# Altium PCB 5811FEM.PcbDoc
Units mil, origin at the board's own origin, x right, y up, seen from the top; angles counter-clockwise.
Board outline 1133.06 x 762 mil, 4 copper layers (Top Layer, Internal Plane 1, Signal Layer 1, Bottom Layer), stack 36.417 mil thick; 97 components, 59 nets, 315 pads, 126 vias.
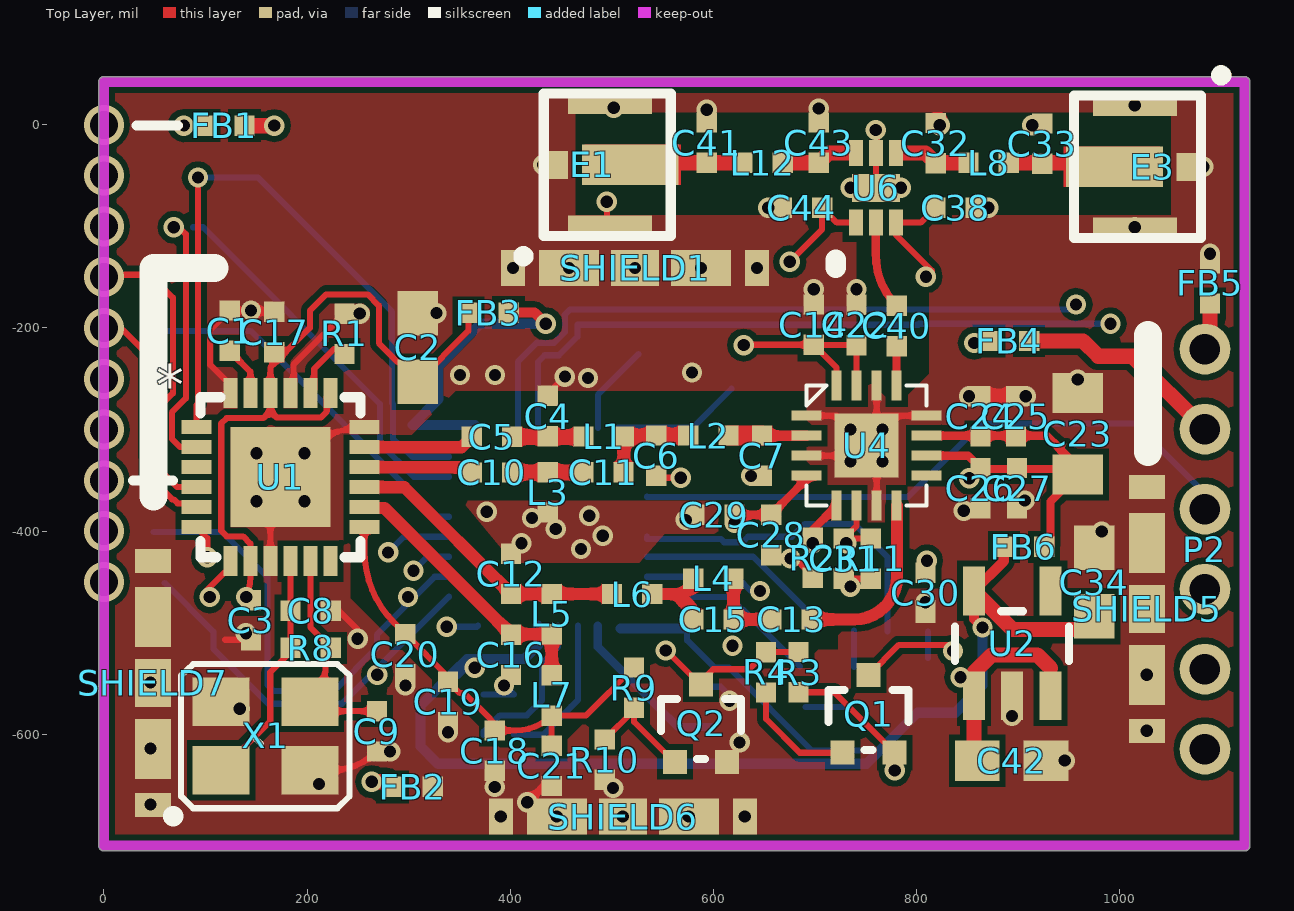
[diagram p0: Top Layer view]
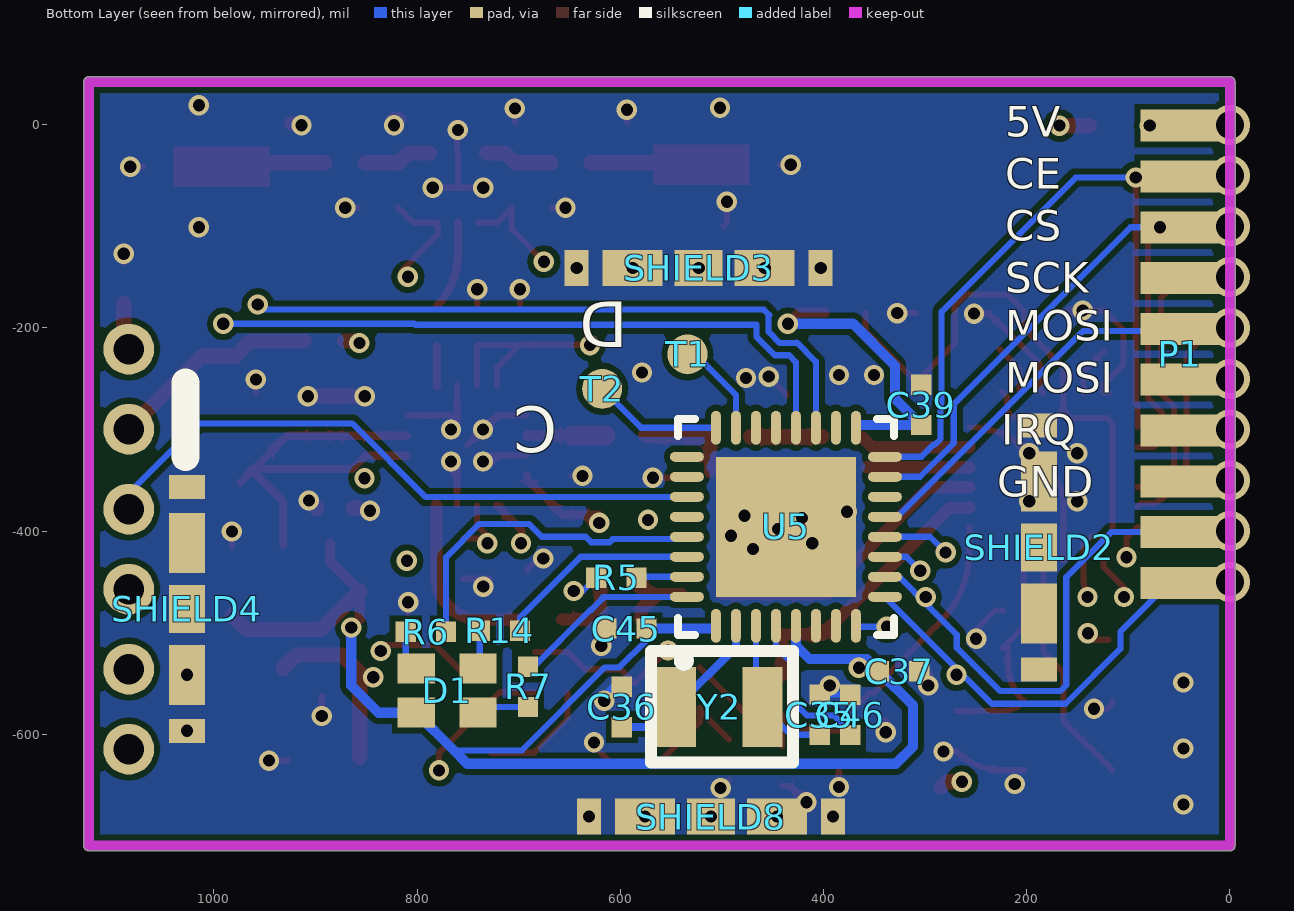
[diagram p1: Bottom Layer view, seen from below]
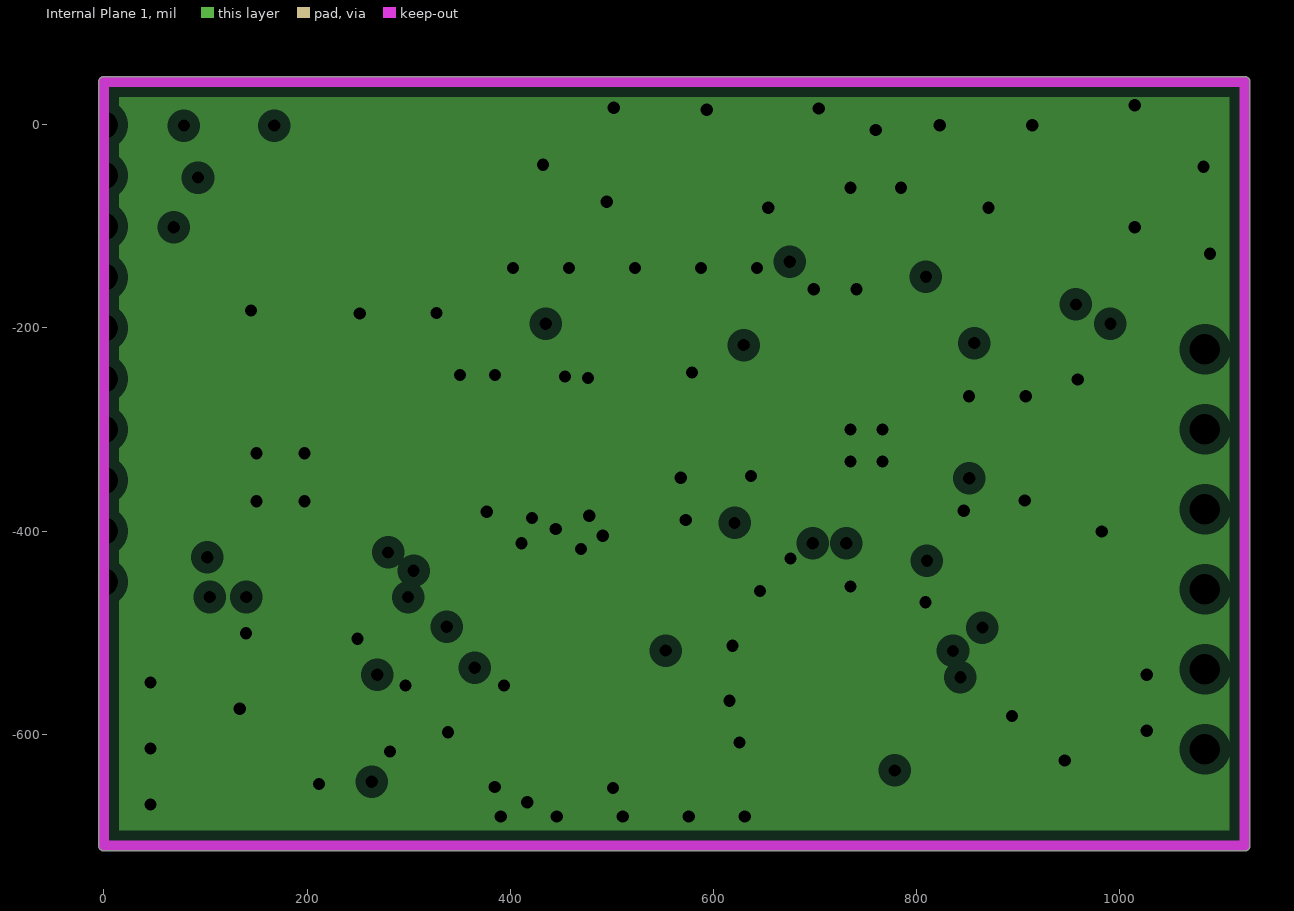
[diagram p2: Internal Plane 1, clearances drawn from the general rule]
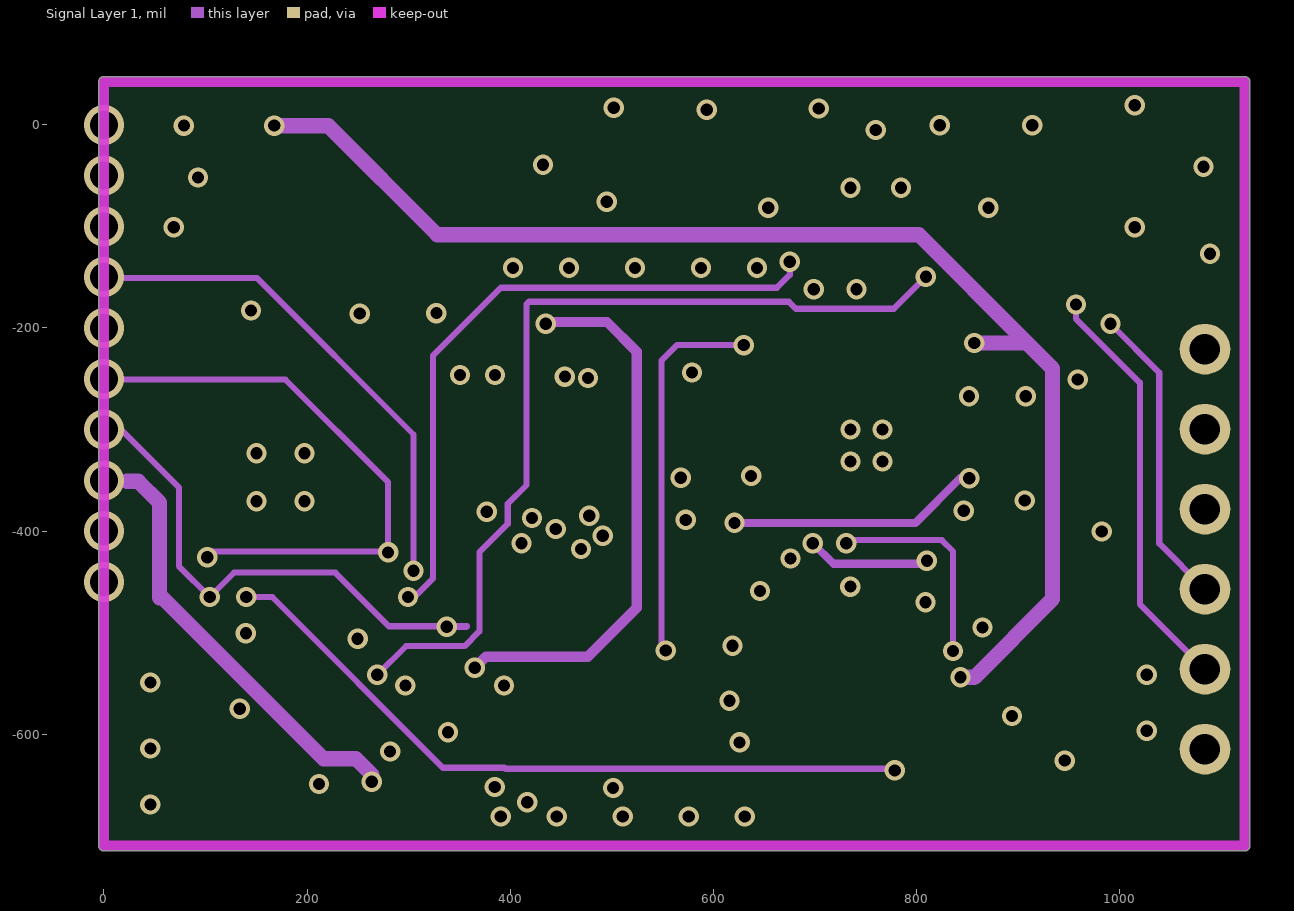
[diagram p3: Signal Layer 1]

## Layer stack, top to bottom
Top Solder: solder mask 0.4, Solder Resist, Dk 3.5
Top Layer: signal copper 0.689
Dielectric 1: prepreg 7.677, FR-4, Dk 4.2
Internal Plane 1: plane copper 0.689, net GND
Dielectric 2: core 18.307, Dk 4.2
Signal Layer 1: signal copper 0.689
Dielectric 3: prepreg 7.677, Dk 4.2
Bottom Layer: signal copper 0.689
Bottom Solder: solder mask 0.4, Solder Resist, Dk 3.5

## Board outline
-5.01,-709.65 ccw(c0,-709.65) 0,-714.66 1123.03,-714.66 ccw(c1123.03,-709.65) 1128.05,-709.65 1128.05,42.32 ccw(c1123.03,42.32) 1123.03,47.34 0,47.34 ccw(c0,42.32) -5.01,42.32

## Design rules (kind name [scope] priority, off if disabled: settings)
Clearance [All] p1: gap=6
MinimumSolderMaskSliver [All] p1 off: minsoldermaskwidth=10
PlaneClearance [All] p1: clearance=10
PlaneConnect [All] p1: planeconnectstyle=Direct reliefexpansion=20 reliefentries=4 reliefconductorwidth=10 reliefairgap=10
PolygonConnect [All] p1: connectstyle=Direct reliefconductorwidth=10 reliefentries=4 polygonreliefangle="90 Angle" airgapwidth=10
RoomDefinition MCU [InComponentClass('MCU')] p1 off: confinementstyle=ConfineIn formatcopy=TRUE lockcomponents=FALSE outline 1142.82,-644.87 3207.82,-644.87 3207.82,-82.87 1142.82,-82.87
RoomDefinition FEM [InComponentClass('FEM')] p2 off: confinementstyle=ConfineIn formatcopy=TRUE lockcomponents=FALSE outline 3398.82,-2606.87 3618.82,-2606.87 3618.82,-2306.87 3398.82,-2306.87
RoomDefinition BK5811 [InComponentClass('BK5811')] p3 off: confinementstyle=ConfineIn formatcopy=TRUE lockcomponents=FALSE outline 3398.82,-2986.87 9698.82,-2986.87 9698.82,-2656.87 3398.82,-2656.87
RoutingVias [All] p1: holewidth=12 width=25 viastyle="Through Hole" minholewidth=12 minwidth=20 maxholewidth=28 maxwidth=50
SilkToBoardRegionClearance [All] p1 off:
SilkToSilkClearance [All] p1 off: silktosilkclearance=10
SilkToSolderMaskClearance [IsPad] p1 off: minsilkscreentomaskgap=10 clearancetoexposedcopper=TRUE
SolderMaskExpansion [All] p1: expansion=4
UnpouredPolygon [All] p1: allowunpoured=FALSE
Width [All] p1: maxlimit=20 minlimit=6 preferedwidth=10
23 further rules are at their usual default settings.

## Classes and differential pairs
component class MCU: C35 C36 C37 C39 C45 C46 D1 FB4 FB5 P2 R5 R6 R7 R14 SHIELD1 SHIELD2 SHIELD3 SHIELD4 SHIELD5 SHIELD6 SHIELD7 SHIELD8 T1 T2 U5 Y2
component class BK5811: C1 C2 C3 C4 C5 C6 C7 C8 C9 C10 C11 C12 C13 C15 C16 C17 C18 C19 C20 C21 FB1 FB2 L1 L2 L3 L4 L5 L6 L7 P1 R1 R8 U1 X1
component class FEM: C14 C22 C23 C24 C25 C26 C27 C28 C29 C30 C31 C32 C33 C34 C38 C40 C41 C42 C43 C44 E1 E3 FB3 FB6 L8 L12 Q1 Q2 R2 R3 R4 R9 R10 R11 U2 U4 U6

## Components (designator, comment, footprint, x,y, rotation, side; value= is the part's Value field where it differs from the comment)
C1 "33nF" 0402 123.82,-202.87 r90 top
C2 "4.7uF" 0603 308.82,-218.87 r270 top
C3 "0.1uF" 0402 144.82,-487.87 r90 top
C4 "0.6pF" 0402 436.82,-286.87 r90 top
C5 "1pF" 0402 381.82,-307.18 r0 top
C6 "NC" 0402 543.82,-325.87 r90 top
C7 "NC" 0402 647.82,-325.87 r90 top
C8 "Cap" 0402 203.35,-478.27 r0 top
C9 "Cap" 0402 268.82,-596.87 r270 top
C10 "1pF" 0402 381.82,-342.18 r0 top
C11 "0.6pF" 0402 491.82,-341.87 r180 top
C12 "0.5pF" 0402 400.82,-441.87 r270 top
C13 "0.5pF" 0402 676.82,-486.87 r0 top
C14 "47pF" 0402 698.82,-196.87 r90 top
C15 "0.5pF" 0402 599.82,-486.87 r0 top
C16 "0.5pF" 0402 400.82,-521.87 r90 top
C17 "0.1uF" 0402 167.82,-203.87 r270 top
C18 "NC" 0402 384.82,-615.87 r270 top
C19 "NC" 0402 338.82,-567.87 r270 top
C20 "NC" 0402 296.82,-520.87 r270 top
C21 "1.2pF" 0402 440.82,-630.87 r270 top
C22 "47pF" 0402 740.82,-196.87 r270 top
C23 "4.7uF" 0805 958.66,-304.13 r270 top
C24 "47pF" 0402 862.82,-286.87 r270 top
C25 "0.1uF" 0402 897.82,-286.87 r270 top
C26 "47pF" 0402 862.82,-357.87 r90 top
C27 "0.1uF" 0402 898.82,-357.87 r90 top
C28 "0.1uF" 0402 656.82,-403.87 r90 top
C29 "47pF" 0402 600.82,-383.87 r0 top
C30 "100pF" 0402 808.82,-460.87 r90 top
C31 "47pF" 0402 728.35,-427.17 r90 top
C32 "NC" 0402 818.82,-17.87 r270 top
C33 "NC" 0402 923.75,-18.4 r270 top
C34 "4.7uF" 0603 974.82,-449.87 r270 top
C35 "22pF" 0402 403.54,-580.71 r90 bottom
C36 "22pF" 0402 598.43,-572.83 r270 bottom
C37 "0.1uF" 0402 325.82,-537.87 r180 bottom
C38 "Cap" 0402 838.58,-81.69 r180 top
C39 "0.1uF" 0402 303.82,-275.87 r90 bottom
C40 "10p" 0402 780.51,-197.83 r270 top
C41 "Cap" 0402 593.5,-17.72 r90 top
C42 "4.7uF" 0603 893.82,-625.87 r180 top
C43 "Cap" 0402 703.74,-17.72 r90 top
C44 "Cap" 0402 687.01,-81.69 r0 top
C45 "0.1uF" 0402 593.82,-495.87 r0 bottom
C46 "0.1uF" 0402 373.82,-580.87 r90 bottom
D1 "LEDx3" LC-0603_Rx2 770.51,-557.01 r270 bottom
E1 "Antenna" IPEX 498.03,-39.37 r90 top
E3 "Antenna" IPEX 1014.76,-41.34 r270 top
FB1 "Res2" 0402 118.82,-0.87 r180 top
FB2 "Res2" 0402 304.13,-651.57 r180 top
FB3 "Res2" 0402 378.82,-184.87 r180 top
FB4 "Res2" 0402 890.82,-212.87 r0 top
FB5 "Res2" 0402 1088.82,-155.87 r270 top
FB6 "Res2" 0402 905.51,-415.35 r0 top
L1 "2nH" 0402 491.82,-306.87 r0 top
L2 "0R/10P" 0402 594.82,-305.87 r0 top
L3 "2nH" 0402 436.82,-361.87 r90 top
L4 "0.5pF" 0402 599.82,-446.87 r0 top
L5 "1nH" 0402 440.82,-481.87 r90 top
L6 "1.5nH" 0402 519.82,-461.87 r0 top
L7 "1nH" 0402 440.82,-561.87 r90 top
L8 "0R/10P" 0402 870.75,-37.4 r0 top
L12 "Inductor" 0402 648.62,-37.4 r180 top
P1 "RFInf" "RFInf - SINGLESIDE" 48.82,-0.87 r180 bottom
P2 "PPMInf" PPMInf 1083.82,-220.87 r180 top
Q1 "PNP" LC-SOT-323(SC-70) 752.82,-579.87 r270 top
Q2 "NPN" LC-SOT-323(SC-70) 587.82,-588.87 r270 top
R1 "62K 1%" 0402 236.82,-205.87 r90 top
R2 "Res2" 0402 697.82,-425.87 r270 top
R3 "Res2" 0402 683.82,-538.87 r90 top
R4 "Res2" 0402 651.82,-538.87 r270 top
R5 "10k" 0402 603.82,-445.87 r0 bottom
R6 "1k" 0402 791.18,-498.94 r0 bottom
R7 "1k" 0402 690.79,-553.07 r270 bottom
R8 "Res2" 0402 203.74,-514.76 r180 top
R9 "10k" 0402 521.82,-553.87 r270 top
R10 "10k" 0402 493.11,-625 r90 top
R11 "Res2" 0402 754.92,-427.17 r90 top
R14 "1k" 0402 718.35,-497.95 r0 bottom
SHIELD1 "D" ShieldHolder_6.5*0.8 522.82,-140.87 r180 top
SHIELD2 "D" ShieldHolder_6.5*0.8 187.82,-415.87 r90 bottom
SHIELD3 "D" ShieldHolder_6.5*0.8 522.82,-140.87 r180 bottom
SHIELD4 "D" ShieldHolder_6.5*0.8 1026.57,-476.38 r90 bottom
SHIELD5 "D" ShieldHolder_6.5*0.8 1026.57,-476.38 r90 top
SHIELD6 "D" ShieldHolder_6.5*0.8 510.82,-680.87 r180 top
SHIELD7 "D" ShieldHolder_6.5*0.8 48.23,-549.21 r90 top
SHIELD8 "D" ShieldHolder_6.5*0.8 510.82,-680.87 r180 bottom
T1 "D" "TestPad - 1mm" 533.82,-225.87 r180 bottom
T2 "TestPad" "TestPad - 1mm" 617.82,-259.87 r180 bottom
U1 "BK5811" BK5811 173.82,-346.87 r0 top
U2 "LP5907" SOT23-5 893.82,-510.87 r0 top
U4 "SKY85703" QFN16-3x3 750.82,-315.87 r0 top
U5 "STM32F051K8U6" STM-UFQFPN32_NX 437.01,-395.67 r90 bottom
U6 "SKY13370-374LF" SKY65404-31 759.84,-62.01 r90 top
X1 "16Mhz" OSCILLATOR-3.2X2.5 158.82,-601.87 r0 top
Y2 "XTAL" "OSCILLATOR-3.2X2.5 - 2P" 500,-572.83 r180 bottom

## Footprints (in the part's own frame and the unit in brackets; to place one, negate y for a bottom-side part, rotate by r counter-clockwise, add the part's x,y. Pads: shape width x height; smd on the part's side, far side on the other; paste and mask are expansions set on the pad)
0402 [mil] "0402-RES"
  rect 20x20 smd: 1(-19.68,0) 2(20,0)
0603 [mil] "0603-RES"
  rect 44x40 smd: 1(-33.46,0) 2(34,0)
0805 [mil]
  rect 39.37x50 smd: 1(-40,0) 2(40,0)
  body extent -50,-30 50,30, height 31
BK5811 [mm]
  rect 2.5x2.5 smd: 0(0,0)
  rect 0.75x0.35 smd: 1(-2.1,1.25) 2(-2.1,0.75) 3(-2.1,0.25) 4(-2.1,-0.25) 5(-2.1,-0.75) 6(-2.1,-1.25) 13(2.1,-1.25) 14(2.1,-0.75) 15(2.1,-0.25) 16(2.1,0.25) 17(2.1,0.75) 18(2.1,1.25)
  rect 0.35x0.75 smd: 7(-1.25,-2.1) 8(-0.75,-2.1) 9(-0.25,-2.1) 10(0.25,-2.1) 11(0.75,-2.1) 12(1.25,-2.1) 19(1.25,2.1) 20(0.75,2.1) 21(0.25,2.1) 22(-0.25,2.1) 23(-0.75,2.1) 24(-1.25,2.1)
  silkscreen extent -2,-2 2,2
IPEX [mil]
  rect 40x95 smd: 1(0,-20)
  rect 19.68x82.68 smd: 2(-60,0) 2(60,0)
  rect 27.56x27.56 smd: 2(0,55)
  Top Layer region: -19.99,-70 20.01,-70 20.01,25 -19.99,25
  silkscreen extent -95,-60 70,90
LC-0603_Rx2 [mm]
  rect 0.75x0.93 smd: 1(-0.55,-0.77) 2(0.55,-0.77) 3(0.55,0.77) 4(-0.55,0.77)
LC-SOT-323(SC-70) [mm]
  rect 0.6x0.6 smd: 1(0.97,-0.65) 2(0.97,0.65) 3(-0.97,0)
  silkscreen extent -0.6,-1 0.9,1, body extent -1.12,-1.1 1.12,1.1, height 1.1
OSCILLATOR-3.2X2.5 [mil] "OSCILLATOR-3.2X2.5"
  rect 56x48 smd: 1(-43.31,-33.46) 2(44,-33.46) 3(44,34) 4(-43.31,34)
  silkscreen extent -95,-83 83,71
"OSCILLATOR-3.2X2.5 - 2P" [mm] "OSCILLATOR-3.2X2.5"
  rect 1x2 smd: 1(-1.143,0) 2(1.016,0)
  silkscreen extent -1.78,-1.4 1.78,1.4
PPMInf [mil]
  round 50 hole 30: 1(0,0) 2(0,78.74) 3(0,157.48) 4(0,236.22) 5(0,314.96) 6(0,393.7)
QFN16-3x3 [mm]
  rect 1.6x1.6 smd: 0(0,0)
  rect 0.75x0.25 smd: 1(-1.5,0.75) 2(-1.5,0.25) 3(-1.5,-0.25) 4(-1.5,-0.75) 9(1.5,-0.75) 10(1.5,-0.25) 11(1.5,0.25) 12(1.5,0.75)
  rect 0.25x0.75 smd: 5(-0.75,-1.5) 6(-0.25,-1.5) 7(0.25,-1.5) 8(0.75,-1.5) 13(0.75,1.5) 14(0.25,1.5) 15(-0.25,1.5) 16(-0.75,1.5)
  silkscreen extent -1.5,-1.5 1.5,1.5, body extent -1.5,-1.5 1.5,1.5, height 0.55
"RFInf - SINGLESIDE" [mm]
  rect 2x0.8 smd: 1(0,0) 2(0,-1.27) 3(0,-2.54) 4(0,-3.81) 5(0,-5.08) 6(0,-6.35) 7(0,-7.62) 8(0,-8.89) 9(0,-10.16) 10(0,-11.43)
ShieldHolder_6.5*0.8 [mm]
  rect 0.6x0.9 smd: 1(-3.05,0) 1(3.05,0)
  rect 1.5x0.9 smd: 1(-1.65,0) 1(1.65,0)
  rect 1.2x0.9 smd: 1(0,0)
SKY65404-31 [mm]
  rect 0.7x1.2 smd: 0(0,0)
  rect 0.65x0.35 smd: 1(-0.87,0.5) 2(-0.87,0) 3(-0.87,-0.5) 4(0.87,-0.5) 5(0.87,0) 6(0.87,0.5)
  silkscreen extent -2,1 -1.8,1
SOT23-5 [mil] "SOT23-5"
  rect 22x48 smd: 1(-37.4,-51.18) 2(0,-51.18) 3(38,-51.18) 4(38,52) 5(-37.4,52)
  silkscreen extent -56,-17 56,32
STM-UFQFPN32_NX [mm] "QFN, 32-Leads, Body 5.1x5.1mm, Pitch 0.5mm, Thermal Pad 3.5x3.5mm, IPC Medium Density"
  oval 0.85x0.25 smd: 1(-2.475,1.75) 2(-2.475,1.25) 3(-2.475,0.75) 4(-2.475,0.25) 5(-2.475,-0.25) 6(-2.475,-0.75) 7(-2.475,-1.25) 8(-2.475,-1.75) 17(2.475,-1.75) 18(2.475,-1.25) 19(2.475,-0.75) 20(2.475,-0.25) 21(2.475,0.25) 22(2.475,0.75) 23(2.475,1.25) 24(2.475,1.75)
  oval 0.25x0.85 smd: 9(-1.75,-2.475) 10(-1.25,-2.475) 11(-0.75,-2.475) 12(-0.25,-2.475) 13(0.25,-2.475) 14(0.75,-2.475) 15(1.25,-2.475) 16(1.75,-2.475) 25(1.75,2.475) 26(1.25,2.475) 27(0.75,2.475) 28(0.25,2.475) 29(-0.25,2.475) 30(-0.75,2.475) 31(-1.25,2.475) 32(-1.75,2.475)
  rect 3.5x3.5 smd: 33(0,0)
  silkscreen extent -3.47,-2.7 2.7,2.7, body extent -2.55,-2.55 2.55,2.55, height 0.6
"TestPad - 1mm" [mm]
  round 1 smd: 1(0,0)

## Part data
C1 C2 C3 C4 C5 C6 C7 C10 C11 C12 C13 C14 C15 C16 C17 C18 C19 C20 C21 C22 C23 C24 C25 C26 C27 C28 C29 C30 C31 C32 C33 C34 C35 C36 C37 C39 C40 C42 C45 C46: library part Cap, "Capacitor"
C8 C9 C38 C41 C43 C44: "Capacitor"
D1: "Typical RED GaAs LED"
E1 E3: "Generic Antenna"
FB1 FB2 FB3 FB4 FB5 FB6 R2 R3 R4 R8 R11: "Resistor"
L1 L2 L3 L4 L5 L6 L7 L8: library part Inductor, "Inductor"
Q1: "PNP Bipolar Transistor"
Q2: "NPN Bipolar Transistor"
R1 R5 R6 R7 R9 R10 R14: library part Res2, "Resistor"
SHIELD1 SHIELD2 SHIELD3 SHIELD4 SHIELD5 SHIELD6 SHIELD7 SHIELD8 T1: library part TestPad
U5: "ARM Cortex-M0 32-bit MCU, 64 KB Flash, 8 KB Internal RAM, 27 I/Os, 32-pin UFQFPN, -40 to 85 degC, Tray"
X1: library part OSCILLATOR-3.2X2.5, "Crystal Oscillator in 3.2x2.5 SMD"
Y2: "Crystal Oscillator"

## Via types
v1: diameter 20, hole 12, Top Layer to Bottom Layer, 102 vias
v2: diameter 19.68, hole 11.81, Top Layer to Bottom Layer, 10 vias
v3: diameter 39.37, hole 27.56, Top Layer to Bottom Layer, 10 vias
v4: diameter 20/20/20 (per signal layer), hole 12, Top Layer to Bottom Layer, 4 vias

## Nets (pads, with @x,y where several pads share a name; then routed paths per layer and width w, separated by ;. In a path a pad name is that pad's centre, name@x,y a point inside that pad or via, vN(x,y) a via of type N, cw(c..) or ccw(c..) an arc to the next point about the centre after c; other vN are vias at no path point)
3.3: C34.2 C37.1 C39.1 C45.1 D1.2 FB3.1 FB6.1 U2.5 U5.1 U5.5 U5.17 | length 2260.6
  Top Layer w10: FB3.1 424.05,-184.87 v1(435.06,-195.88) ; v1(864.82,-494.87) 856.42,-486.46 U2.5 885.83,-429.46 FB6.1@885.83,-412.4
  Top Layer w15: U2.5 894.42,-496.87 968.24,-496.87 C34.2@982.28,-482.82
  Signal Layer 1 w10: v1(365.18,-534.47) 376.03,-523.62 476.38,-523.62 524.61,-475.39 524.61,-223.43 495.3,-194.12 v1@435.06,-194.12
  Bottom Layer w6: C45.1 574.13,-507.46 600.82,-534.15 615.1,-534.15 696.82,-615.87 763.62,-615.87
  Bottom Layer w10: v1(365.18,-534.47) 353.87,-534.47 347.99,-540.35 C37.1 ; U5.17@365.43,-295.55 C39.1 329.55,-269.82 329.55,-237.13 370.81,-195.88 v1(435.06,-195.88) ; U5.5 427.17,-512.52 413.82,-525.87 357.5,-525.87 C37.1 ; U5.1@508.66,-495.87 C45.1 ; v1(864.82,-494.87) 864.82,-551.87 838.02,-578.66 D1.2 763.62,-615.87 750.62,-628.87 328.82,-628.87 311.82,-611.87 311.82,-571.55 C37.1
3.3NRF: C2.2 C3.2 C17.2 FB3.2 Q1.2 R3.1 U1.8 U1.19 U1.22 | length 1553
  Top Layer w6: C3.2@140.24,-470.44 v1(140.24,-464.79) ccw(c91.47,-444.51) 144.29,-444.51 U1.8 144.29,-412.34 137.03,-405.08 120.88,-405.08 115.61,-399.81 115.61,-293.93 120.88,-288.65 157.03,-288.65 163.98,-281.71 ; U1.19@224.53,-262.69 U1.19 219.24,-267.98 219.24,-282.68 213.96,-287.95 170.22,-287.95 163.98,-281.71 ; FB3.2 358.82,-202.87 C2.2 270.82,-214.87 270.82,-178 259.69,-166.87 218.82,-166.87 202.82,-182.87 202.82,-199.87 163.98,-238.71 U1.22 163.98,-281.71 ; R3.1 718.91,-558.55 Q1.2 v1(778.41,-635.46)
  Signal Layer 1 w6: v1(140.24,-464.79) 165.75,-464.79 333.82,-632.87 394.28,-632.87 395.28,-633.87 776.82,-633.87 v1(778.41,-635.46)
5V: C42.2 FB1.1 FB4.1 U2.1 U2.3 | length 1485.4
  Top Layer w15: FB1.1 v1(167.82,-0.87) ; C42.2@856.42,-622.46 U2.1 856.42,-539.27 873.82,-521.87 918.82,-521.87 931.82,-534.87 ; v1(856.82,-214.87) 856.82,-212.87 FB4.1
  Signal Layer 1 w15: v1(167.82,-0.87) 220.82,-0.87 328.22,-108.27 802.22,-108.27 908.82,-214.87 ; v1(843.12,-543.87) 856.82,-543.87 933.82,-466.87 933.82,-239.87 908.82,-214.87 ; v1@854.82,-214.87 v1(856.82,-214.87) 908.82,-214.87
CE: P1.2 U1.1 U5.16 | length 679.9
  Top Layer w6: U1.1 91.14,-275.93 92.71,-274.36 v1(92.71,-51.98)
  Bottom Layer w6: v1(92.71,-51.98) 151.93,-51.98 283.82,-183.87 283.82,-273.74 284.82,-274.74 284.82,-309.28 290.09,-314.55 291.5,-314.55 303.72,-326.77 U5.16
  other v3: 0,-50
CRX: C14.1 C22.2 Q2.3 R3.2 R4.1 U4.15 U4.16 | length 730.5
  Top Layer w6: v1(553.11,-517.46) 553.61,-517.46 585.82,-549.68 599.63,-535.87 635.13,-535.87 R4.1 652.13,-518.87 R3.2 ; v1@631.13,-216.55 C14.1 C14.1@699.13,-216.87 ; U4.16 721.29,-239.02 C14.1@699.13,-216.87 ; C22.2 C14.1@699.13,-216.87 ; U4.15 C22.2@740.98,-217.02
  Signal Layer 1 w6: v1@553.51,-517.87 v1(553.11,-517.46) 548.94,-513.3 548.94,-231.99 564.07,-216.87 v1(629.82,-216.87)
CSN: P1.3 U1.2 U5.15 | length 625.4
  Top Layer w6: v1(68.82,-100.87) 73.82,-100.87 80.71,-107.76 80.71,-269.39 66.93,-283.17 66.93,-309.06 75.21,-317.34 U1.2
  Bottom Layer w6: P1.3@87.82,-100.87 97.82,-100.87 271.82,-274.87 271.82,-313.25 305.03,-346.46 U5.15
  other v3: 0,-100
GND: C1.2 C2.1 C3.1 C4.2 C6.1 C7.1 C8.2 C9.2 C12.1 C14.2 C16.1 C17.1 C18.2 C19.2 C20.2 C21.2 C22.1 C23.1 C24.1 C25.1 C26.1 C27.1 C28.1 C29.1 C30.1 C31.1 C32.1 C33.1 C34.1 C35.2 C36.1 C37.2 C38.1 C39.2 C41.2 C42.1 C43.2 C44.1 C45.2 C46.2 E1.2 E3.2 FB2.1 FB5.1 L3.1 Q2.2 R1.2 R2.2 R5.2 R10.1 R11.1 SHIELD1.1 SHIELD2.1 SHIELD3.1 SHIELD4.1 SHIELD5.1 SHIELD6.1 SHIELD7.1 SHIELD8.1 U1.0 U1.9 U1.18 U1.21 U1.24 U2.2 U4.0 U4.1 U4.3 U4.7 U4.12 U4.14 U5.33 U6.0 U6.5 X1.2 X1.4 | length 1640.3
  Top Layer w6: X1.4 115.51,-569.56 120.82,-574.87 v1(133.82,-574.87) ; U1.24@119.14,-264.19 U1.24 124.61,-256.07 104.71,-236.17 104.71,-201.98 C1.2 v1(144.82,-182.87) ; 119.5,-506.87 C3.1@144.13,-506.87 ; v1@146.13,-184.18 C17.1 ; U1.9 163.98,-370.63 cw(c197.58,-370.63) U1.0 ; U1.21 186.82,-261.03 186.82,-235.87 R1.2 v1(251.82,-185.87) ; v4(197.44,-323.24) 199.37,-321.32 cw(c256.5,-378.44) U1.18 ; X1.2 224.24,-635.33 ccw(c224.24,-572.29) C9.2 v1(281.82,-616.87) ; C8.2 231.23,-478.27 249.82,-496.87 v1(249.82,-505.87) ; C2.1 v1(327.35,-185.4) ; v1(384.82,-651.87) C18.2 ; C16.1@392.82,-550.87 v1(393.82,-551.87) ; C12.1 v1(411.13,-411.87) ; v1(416.82,-666.87) 432.82,-650.87 C21.2 ; v1(432.31,-39.37) E1.2@443.03,-39.37 ; C4.2 436.82,-264.87 v1(453.82,-247.87) ; R10.1 v1(501.29,-652.87) ; v1(495.08,-75.79) 495.08,-96.42 496.82,-98.16 E1.2@498.03,-99.37 ; E1.2@498.03,20.63 v1(501.82,16.84) ; C6.1 545.69,-347.42 v1(567.94,-347.42) ; C41.2 v1(593.5,14.82) ; Q2.2@611.41,-626.06 625.82,-611.65 v1(625.82,-607.87) ; v1(637.13,-345.55) C7.1 ; v1(653.99,-81.69) C44.1 ; v1(675.82,-426.87) 680.33,-426.87 R2.2@692.01,-438.55 ; U4.3 U4.0@740.98,-325.71 ; U4.1 721.29,-286.34 v2(735.07,-300.12) U4.0 ; C14.2 v1(698.82,-161.87) ; C43.2 v1(703.74,16.06) ; C31.1 R11.1 ; v1(734.96,-62.01) U6.0 ; C22.1 v1(740.82,-161.87) ; v1(759.84,-5.13) 760.82,-6.11 760.82,-26.78 U6.5 U6.0 ; U4.7 U4.0@760.66,-325.71 ; U4.0@760.66,-306.02 U4.0@760.66,-292.87 ; U4.14 U4.0@760.66,-292.87 ; v1(784.68,-62.01) U6.0 ; C30.1 v1(808.82,-469.87) ; U4.12 767.19,-286.34 U4.0@760.66,-292.87 ; C38.1 v1(870.65,-81.69) ; v1(893.82,-581.87) U2.2 ; C42.1 v1(945.82,-625.87) ; C23.1 v1(958.66,-250.71) ; C34.1@982.28,-415.35 v1(982.28,-400.33) ; E3.2@1014.76,-101.34 v1(1014.76,-100.92) ; E3.2@1014.76,18.66 v1(1014.76,19.19) ; E3.2@1069.76,-41.34 v1(1082.29,-41.34) ; FB5.1 v1(1088.82,-126.87)
  Top Layer w10: C3.1@135.82,-504.55 v1(139.82,-500.55) ; v1(296.82,-551.87) C20.2 ; v1(338.82,-597.87) C19.2
  Top Layer w15: C32.1@817.75,5.28 823.06,5.28 823.06,-0.09 v1(822.75,-0.4) ; v1(851.5,-267.18) C24.1 C25.1 v1(907.5,-267.18) ; C26.1@858.5,-377.55 C26.1 ; C27.1 v1(906.5,-369.87) ; v1(913.75,-0.4) 913.43,-0.09 913.43,1.28 C33.1
  Signal Layer 1 w6: v1@129.82,-570.87 v1(133.82,-574.87) ; v1(249.82,-505.87) v1@249.82,-504.87
  Signal Layer 1 w15: v1(846.35,-379.87) v1@846.35,-379.57
  Bottom Layer w6: C46.2 C35.2@403.39,-560.87 ; v1(393.82,-551.87) 393.7,-551.75 393.7,-550.87 C35.2 ; C36.1 607.23,-553.15 615.82,-561.74 v1(615.82,-566.87) ; R5.2 636.82,-458.87 v1(645.82,-458.87)
  other v1: 390.74,-680.87 445.86,-680.87 510.82,-680.87 575.78,-680.87 630.9,-680.87 45.82,-668.94 211.82,-648.87 45.82,-613.83 1026.57,-596.46 45.82,-548.87 1026.57,-541.34 618.82,-512.87 734.82,-454.55 491.14,-404.53 444.82,-397.87 572.82,-388.87 477.82,-384.87 376.82,-380.87 402.74,-140.87 457.86,-140.87 522.82,-140.87 587.78,-140.87 642.9,-140.87
  other v2: 469.49,-417.32 421.26,-386.81 735.07,-331.61 766.57,-331.61 766.57,-300.12 476.38,-249.02 350.39,-246.06 384.84,-246.06 578.82,-243.87
  other v4: 150.2,-370.49 197.44,-370.49 150.2,-323.24
IRQ: P1.7 U1.7 U5.8 | length 585.3
  Top Layer w6: v1(104.19,-464.79) 101.82,-462.42 101.82,-457.87 124.61,-435.08 U1.7
  Signal Layer 1 w6: v3@17.82,-300.87 73.82,-356.87 73.82,-434.42 v1(104.19,-464.79) ; v1@104.19,-468.5 v1(104.19,-464.79) ; v1(337.61,-494.12) 357.08,-494.12 357.57,-493.62 280.57,-493.62 227.82,-440.87 128.12,-440.87 v1(104.19,-464.79)
  Bottom Layer w6: v1(337.61,-494.12) 367.1,-494.12 U5.8
  other v3: 0,-300
MISO: P1.6 U1.6 U5.12 | length 656
  Top Layer w6: U1.6 101.82,-406.76 101.82,-425.61 v1(101.72,-425.71)
  Signal Layer 1 w6: v3@17.82,-250.87 178.82,-250.87 279.82,-351.87 v1(279.82,-420.87) ; v1(101.72,-425.71) 101.72,-419.97 v1@278.92,-419.97
  Bottom Layer w6: v1(279.82,-420.87) 295.17,-405.51 U5.12
  other v3: 0,-250
MOSI: P1.5 U1.5 U5.13 | length 580.5
  Top Layer w6: v3@18.82,-201.87 42.82,-225.87 42.82,-328.07 42.93,-328.18 42.93,-344.35 67.29,-368.71 68.76,-368.71 72.65,-372.6 87.35,-372.6 U1.5
  Bottom Layer w6: P1.5@48.82,-202.87 144.47,-202.87 327.43,-385.83 U5.13
  other v3: 0,-200
NetC1_1: C1.1 U1.23 | length 50.1
  Top Layer w6: C1.1 144.29,-243.02 U1.23
NetC4_1: C4.1 C5.2 L1.1 | length 70.4
  Top Layer w6: L1.1@471.82,-307.18 L1.1
  Top Layer w15: C5.2 L1.1@471.82,-307.18
NetC5_1: C5.1 U1.17 | length 109.8
  Top Layer w12: U1.17 351.98,-317.34 C5.1
NetC6_2: C6.2 C11.1 L1.2 L2.1 | length 97.9
  Top Layer w6: L1.2@511.5,-307.18 L1.2
  Top Layer w12: C11.1 511.82,-341.55 L1.2
  Top Layer w15: L1.2 C6.2@542.82,-306.87 ; C6.2 L2.1
NetC7_2: C7.2 L2.2 U4.2 | length 76.8
  Top Layer w10: C7.2@647.98,-306.02 U4.2
  Top Layer w20: L2.2 C7.2
NetC8_1: C8.1 R8.2 U1.10 X1.1 | length 244.2
  Top Layer w6: X1.1 163.82,-587.02 163.82,-538.87 183.66,-519.02 C8.1 ; 183.66,-488.5 U1.10
NetC9_1: C9.1 R8.1 U1.11 X1.3 | length 220.6
  Top Layer w6: X1.3@203.35,-566.59 cw(c201.55,-566.59) X1.3 ; U1.11 203.35,-494.69 R8.1 ; R8.1@218.5,-514.87 218.5,-530 cw(c164.95,-530) X1.3 ; C9.1 225.31,-577.18 cw(c225.31,-545.38) X1.3
NetC10_1: C10.1 U1.16 | length 100.5
  Top Layer w12: U1.16 C10.1@356.98,-337.02
NetC10_2: C10.2 C11.2 L3.2 | length 70.1
  Top Layer w6: C11.2@471.5,-342.18 C11.2
  Top Layer w15: C10.2 C11.2@471.5,-342.18
NetC12_2: C12.2 L5.2 L6.1 U1.15 | length 291.4
  Top Layer w6: C12.2@397.82,-464.87 C12.2
  Top Layer w12: U1.15 295.66,-356.71 C12.2 L5.2 L6.1
NetC13_1: C13.1 C15.2 L4.2 | length 77.3
  Top Layer w12: L4.2 C15.2 C13.1
NetC13_2: C13.2 U4.8 | length 177.9
  Top Layer w12: C13.2 738.82,-486.87 ccw(c738.82,-444.87) 780.82,-444.87 U4.8@780.82,-374.92
NetC15_1: C15.1 L4.1 L6.2 | length 88.1
  Top Layer w12: L6.2 555.13,-461.87 ; C15.1 ccw(c555.13,-486.87) 555.13,-461.87 ; L4.1 cw(c565.13,-446.87) 565.13,-461.87 555.13,-461.87
NetC16_2: C16.2 L5.1 L7.2 U1.14 | length 281.6
  Top Layer w6: C16.2@397.82,-498.87 C16.2 ; 412.5,-497.87 412.82,-497.55
  Top Layer w12: U1.14 257.29,-377.19 276.23,-377.19 C16.2@400.82,-501.78 ; C16.2 C16.2@400.82,-501.78 ; L7.2 L5.1 400.82,-501.55 C16.2@400.82,-501.78
NetC18_1: C18.1 C19.1 C20.1 C21.1 L7.1 R9.1 U1.13 | length 442.8
  Top Layer w6: U1.13 256.5,-419.44 ccw(c356.5,-419.44) 285.79,-490.15 C20.1 339.27,-543.63 339.27,-548.22 350.4,-559.35 354.99,-559.35 379.87,-584.23 cw(c367.92,-596.18) C18.1 405.5,-596.18 ccw(c405.5,-546.23) L7.1 ; C19.1@338.82,-549.87 C19.1 ; C21.1 L7.1 ; R9.1 474.45,-581.55 L7.1
NetC30_2: C30.2 R2.1 U4.5 | length 179.1
  Top Layer w8: v1(697.82,-411.87) 697.82,-415.61 697.35,-416.08 697.35,-398.87 U4.5
  Signal Layer 1 w8: v1(697.82,-411.87) 718.04,-432.09 810.04,-432.09 810.08,-432.04 v1(810.08,-429.12)
NetC32_2: C32.2 L8.1 U6.4 | length 66.4
  Top Layer w15: 787.82,-27.76 808.71,-27.76 C32.2 ; C32.2@819.8,-37.4 L8.1
NetC33_2: C33.2 E3.1 L8.2 | length 100.1
  Top Layer w15: L8.2 E3.1@990.83,-37.4
NetC35_1: C35.1 U5.3 Y2.2 | length 150.3
  Bottom Layer w6: C35.1 432.44,-600.39 Y2.2 466.54,-566.3 U5.3
NetC36_2: C36.2 U5.2 Y2.1 | length 165.8
  Bottom Layer w8: U5.2 486.22,-514.06 Y2.1 565,-592.83 C36.2
NetC38_2: C38.2 P1.10 U5.9 U6.3 | length 1373.9
  Top Layer w6: v1(809.09,-149.61) 814.96,-143.7 779.53,-108.27 U6.3 804.02,-96.26 C38.2
  Signal Layer 1 w6: v1(269.19,-541.37) 297.44,-513.12 355.05,-513.12 369.57,-498.59 369.57,-420.78 397.6,-392.75 397.6,-373 416.06,-354.54 416.06,-176.46 418.31,-174.21 674.21,-174.21 681.1,-181.1 777.61,-181.1 v1(809.09,-149.61)
  Bottom Layer w6: P1.10@59.82,-450.87 107.82,-498.87 107.82,-515.87 161.82,-569.87 234.27,-569.87 v1@265.75,-538.39 ; v1(269.19,-541.37) 265.75,-541.37 v1@265.75,-538.39 ; U5.9 v1@265.75,-538.39
  other v3: 0,-450
NetC40_1: C40.1 U6.2 | length 87.4
  Top Layer w8: U6.2 759.84,-128.25 ccw(c830.41,-128.25) C40.1
NetC40_2: C40.2 U4.13 | length 38.8
  Top Layer w8: U4.13 C40.2@780.35,-218
NetC41_1: C41.1 E1.1 L12.2 | length 108.6
  Top Layer w15: E1.1@520,-37.4 C41.1 L12.2
NetC43_1: C43.1 L12.1 U6.6 | length 67.5
  Top Layer w15: L12.1 C43.1 713.39,-27.76 731.82,-27.76
NetC44_2: C44.2 P1.9 U5.10 U6.1 | length 1248.3
  Top Layer w6: v1(299.44,-464.87) v1@299.44,-460.63 ; v1(675.2,-134.84) 707.01,-103.03 C44.2 721.57,-96.26 U6.1
  Signal Layer 1 w6: v1(299.44,-464.87) 305.69,-464.87 323.82,-446.74 323.82,-227.36 390.75,-160.43 662.4,-160.43 675.2,-147.64 v1(675.2,-134.84)
  Bottom Layer w6: P1.9 116.82,-400.87 161.1,-445.15 161.1,-551.48 167.05,-557.43 226.25,-557.43 268.82,-514.87 268.82,-501.74 295.71,-474.84 ; v1@295.71,-460.63 v1@295.71,-464.87 ; v1(299.44,-464.87) v1@295.71,-464.87 ; U5.10 325.67,-444.88 295.71,-474.84 ; 295.71,-474.84 v1@295.71,-464.87
  other v3: 0,-400
NetC46_1: C46.1 U5.4 | length 153.2
  Bottom Layer w6: C46.1 373.82,-597.39 389.82,-581.39 416.29,-581.39 431.32,-566.37 431.32,-529.74 446.85,-514.2 U5.4
NetD1_1: D1.1 R6.2 | length 26.1
  Bottom Layer w6: D1.1@811.18,-525 R6.2
NetD1_3: D1.3 R7.2 | length 43.8
  Bottom Layer w6: R7.2 D1.3@734.61,-573.07
NetD1_4: D1.4 R14.2 | length 35.6
  Bottom Layer w6: D1.4@738.35,-533.5 R14.2
NetFB1_2: FB1.2 P1.1
  other v1: 78.82,-0.87
  other v3: 0,0
NetFB2_2: FB2.2 P1.8 | length 444.8
  Top Layer w15: v1(263.79,-646.69) 279.21,-646.65 FB2.2
  Signal Layer 1 w15: 22.82,-350.87 33.82,-350.87 54.82,-371.87 54.82,-465.55 57.74,-465.55 216.2,-624.02 248.03,-624.02 263.79,-639.78 v1(263.79,-646.69)
  other v3: 0,-350
NetFB4_2: FB4.2 P2.2 | length 208.9
  Top Layer w15: FB4.2 963.82,-212.87 978.82,-227.87 1012.08,-227.87 P2.2
NetFB5_2: FB5.2 P2.1 | length 40
  Top Layer w15: P2.1@1088.82,-215.87 FB5.2
NetQ1_1: Q1.1 R4.2 | length 115.2
  Top Layer w6: R4.2 651.82,-584.87 685.01,-618.06 Q1.1
NetQ2_1: Q2.1 R9.2 R10.2 | length 108.7
  Top Layer w6: R10.2 R9.2@521.82,-576.29 ; R9.2 R9.2@521.82,-576.29 ; Q2.1@560.23,-626.06 521.82,-587.65 R9.2@521.82,-576.29
NetR1_1: R1.1 U1.20 | length 48
  Top Layer w6: U1.20@207.14,-260.39 207.14,-240.23 R1.1@226.82,-220.55
NetR5_1: R5.1 U5.31 | length 50.1
  Bottom Layer w6: U5.31 583.15,-444.88 R5.1
NetR6_1: R6.1 U5.29 | length 335
  Bottom Layer w6: U5.29 534.45,-407.87 607.59,-407.87 610.59,-410.87 628.69,-410.87 634.04,-405.51 677.3,-405.51 689.95,-392.87 738.82,-392.87 771.5,-425.54 R6.1
NetR7_1: R7.1 U5.32 | length 180.1
  Bottom Layer w6: U5.32 534.45,-464.87 616.82,-464.87 617.82,-465.87 617.82,-466.74 628.95,-477.87 629.82,-477.87 R7.1@685.34,-533.39
NetR14_1: R14.1 U5.30 | length 202
  Bottom Layer w6: U5.30 639.02,-425.2 698.66,-484.84 R14.1
NetT1_1: T1.1 U5.23 | length 88.9
  Bottom Layer w6: U5.23 486.22,-265.82 T1.1@526.17,-225.87
NetT2_1: T2.1 U5.24 | length 127.8
  Bottom Layer w6: U5.24 579.46,-298.23 T2.1
PA_EN: C31.2 Q1.3 R11.2 U4.6 | length 375.8
  Top Layer w6: v1(730.82,-411.87) 735.12,-407.57 C31.2@735.12,-407.17 ; U4.6 740.98,-394.54 C31.2 C31.2@735.12,-407.17 ; Q1.3 782.63,-511.87 829.82,-511.87 v1(835.82,-517.87) ; R11.2 C31.2@735.12,-407.17
  Signal Layer 1 w6: v1(730.82,-411.87) v1@732.82,-409.87 ; v1@733.82,-408.87 824.82,-408.87 835.82,-419.87 v1(835.82,-517.87)
PPM: P2.3 U5.27 | length 608.3
  Bottom Layer w6: U5.27 534.45,-366.42 791.38,-366.42 863.93,-293.87 1014.82,-293.87 P2.3@1083.82,-362.87
RX1: P2.4 U5.20 | length 950.6
  Signal Layer 1 w6: v1(990.82,-195.87) 1038.82,-243.87 1038.82,-412.09 P2.4
  Bottom Layer w6: U5.20 427.17,-233.52 433.81,-226.88 447.9,-226.88 466.06,-208.72 466.06,-196.87 801.57,-196.87 802.57,-195.87 v1(990.82,-195.87)
SCK: P1.4 U1.4 U5.11 | length 799.3
  Top Layer w6: 21.05,-147.64 45.28,-147.64 67.91,-170.28 67.91,-264.28 54.93,-277.27 54.93,-339.38 72.26,-356.71 U1.4
  Signal Layer 1 w6: v3@17.82,-150.87 150.82,-150.87 304.82,-304.87 v1(304.82,-438.87)
  Bottom Layer w6: v1(304.82,-438.87) 318.49,-425.2 U5.11
  other v3: 0,-150
TX1: P2.5 U5.19 | length 1053.4
  Signal Layer 1 w6: v1(956.82,-176.87) 956.82,-190.87 1019.82,-253.87 1019.82,-471.83 P2.5
  Bottom Layer w6: U5.19 407.48,-233.2 426.5,-214.19 427.19,-214.88 442.93,-214.88 454.06,-203.75 454.06,-188.01 453.37,-187.32 458.82,-181.87 v1@951.82,-181.87
VFEM: C23.2 C24.2 C25.2 C26.2 C27.2 C28.2 C29.2 FB6.2 U4.4 U4.10 U4.11 | length 771.6
  Top Layer w8: v1(620.82,-391.87) C29.2 C28.2 691.76,-348.92 U4.4 ; U4.10 850.66,-325.71 C26.2 863.82,-338.87 C23.2@960.82,-338.87 ; U4.11 927.98,-306.02 C23.2@960.82,-338.87 ; FB6.2@931.82,-413.87 931.82,-370.98 C23.2 ; C23.2@973.82,-351.87 962.37,-340.42 C23.2@960.82,-338.87
  Top Layer w10: C23.2 C23.2@962.37,-340.42
  Signal Layer 1 w8: v1(620.82,-391.87) 798.82,-391.87 842.82,-347.87 v1(851.82,-347.87)
pads on no net: P2.6 U1.3 U1.12 U2.4 U4.9 U5.6 U5.7 U5.14 U5.18 U5.21 U5.22 U5.25 U5.26 U5.28

## Polygon pours and split planes (outlines as drawn)
GND on Top Layer "Top Layer-No Net" (solid, remove dead copper, pour order 2): -108.27,105.31 -60.04,57.09 1323.82,57.09 1323.82,-637.8 1108.27,-853.35 1038.39,-783.46 -34.45,-783.46
GND on Bottom Layer "Top Layer-No Net" (solid, remove dead copper, pour order 4): -79.72,126.97 1200.79,126.97 1250,77.76 1274.61,53.15 1274.61,-856.3 0.98,-856.3 -38.39,-816.93
GND on Internal Plane 1 (split plane): 1107.95,-694.56 15.08,-694.56 15.08,27.24 1107.95,27.24

## Keep-outs
Keep-Out Layer:
  lines w10: 0,-709.65 1123.03,-709.65 1123.03,42.32 0,42.32 0,-709.65

## Other copper
Top Layer:
  pour cut-out: 242.53,-307.46 242.53,-465.93 389.57,-612.98 448.65,-612.98 503.55,-558.08 503.55,-516.87 722.82,-516.87 722.82,-418.87 661.21,-418.87 644.69,-402.35 551.97,-402.35 527.07,-430.89 403.22,-430.89 352.48,-369.87 691.76,-369.87 691.76,-261.87 346.19,-261.87 300.6,-307.46
  pour cut-out: 738.19,-83.66 740.98,-86.45 740.98,-239.01 774.61,-272.64 784.45,-272.64 812.01,-245.08 812.01,-84.48
  pour cut-out: 464.57,-88.58 1050.2,-88.58 1050.2,11.81 464.57,11.81

## Silkscreen, mask and mechanical layers (free items; w line width, h text height)
Top Overlay:
  lines w9.84: 28.94,-350.2 68.31,-350.2 ; 32.4,-0.91 72.91,-0.91
  lines w27.56: 48.82,-365.87 48.82,-140.87 108.82,-140.87 ; 1027.56,-321.85 1027.56,-206.69
Bottom Overlay:
  lines w27.56: 1027.82,-326.87 1027.82,-253.87
  text "5V" at 221.22,-11.61 h30
  text "CE" at 221.22,-62.8 h30
  text "CS" at 221.22,-113.98 h30
  text "SCK" at 221.22,-165.16 h30
  text "MOSI" at 221.22,-212.4 h30
  text "D" at 592.82,-218.87 h45
  text "MOSI" at 221.22,-263.58 h30
  text "IRQ" at 225.16,-314.76 h30
  text "C" at 662.2,-322.39 h45
  text "GND" at 229.09,-365.94 h30
Top Solder:
  lines w27.56: 48.82,-390.87 48.82,-485.87 48.84,-685.79 1028.82,-685.79 1028.82,-294.57 ; 123.82,-140.87 716.54,-140.87 ; 812.99,-138.78 1028.82,-138.78 1028.82,-199.53
Bottom Solder:
  lines w27.56: 184.82,-393.87 184.82,-291.87 ; 185.82,-516.87 185.82,-685.87 1028.82,-685.87 1028.82,-326.87 ; 282.82,-140.87 1026.82,-140.87 ; 1027.82,-253.87 1027.82,-141.87

## Text inside footprints (layer, text, board x,y; h text height)
U1: Top Overlay "*" at 51.77,-276 h40